# Altium PCB Arduino_DIY_V1.0.PcbDoc (part 1 of 3)
Units mil, origin at the board's own origin, x right, y up, seen from the top; angles counter-clockwise.
Board outline 4035.9 x 4932.05 mil, 2 copper layers (Top Layer, Bottom Layer), stack 46.063 mil thick; 122 components, 93 nets, 431 pads, 264 vias.
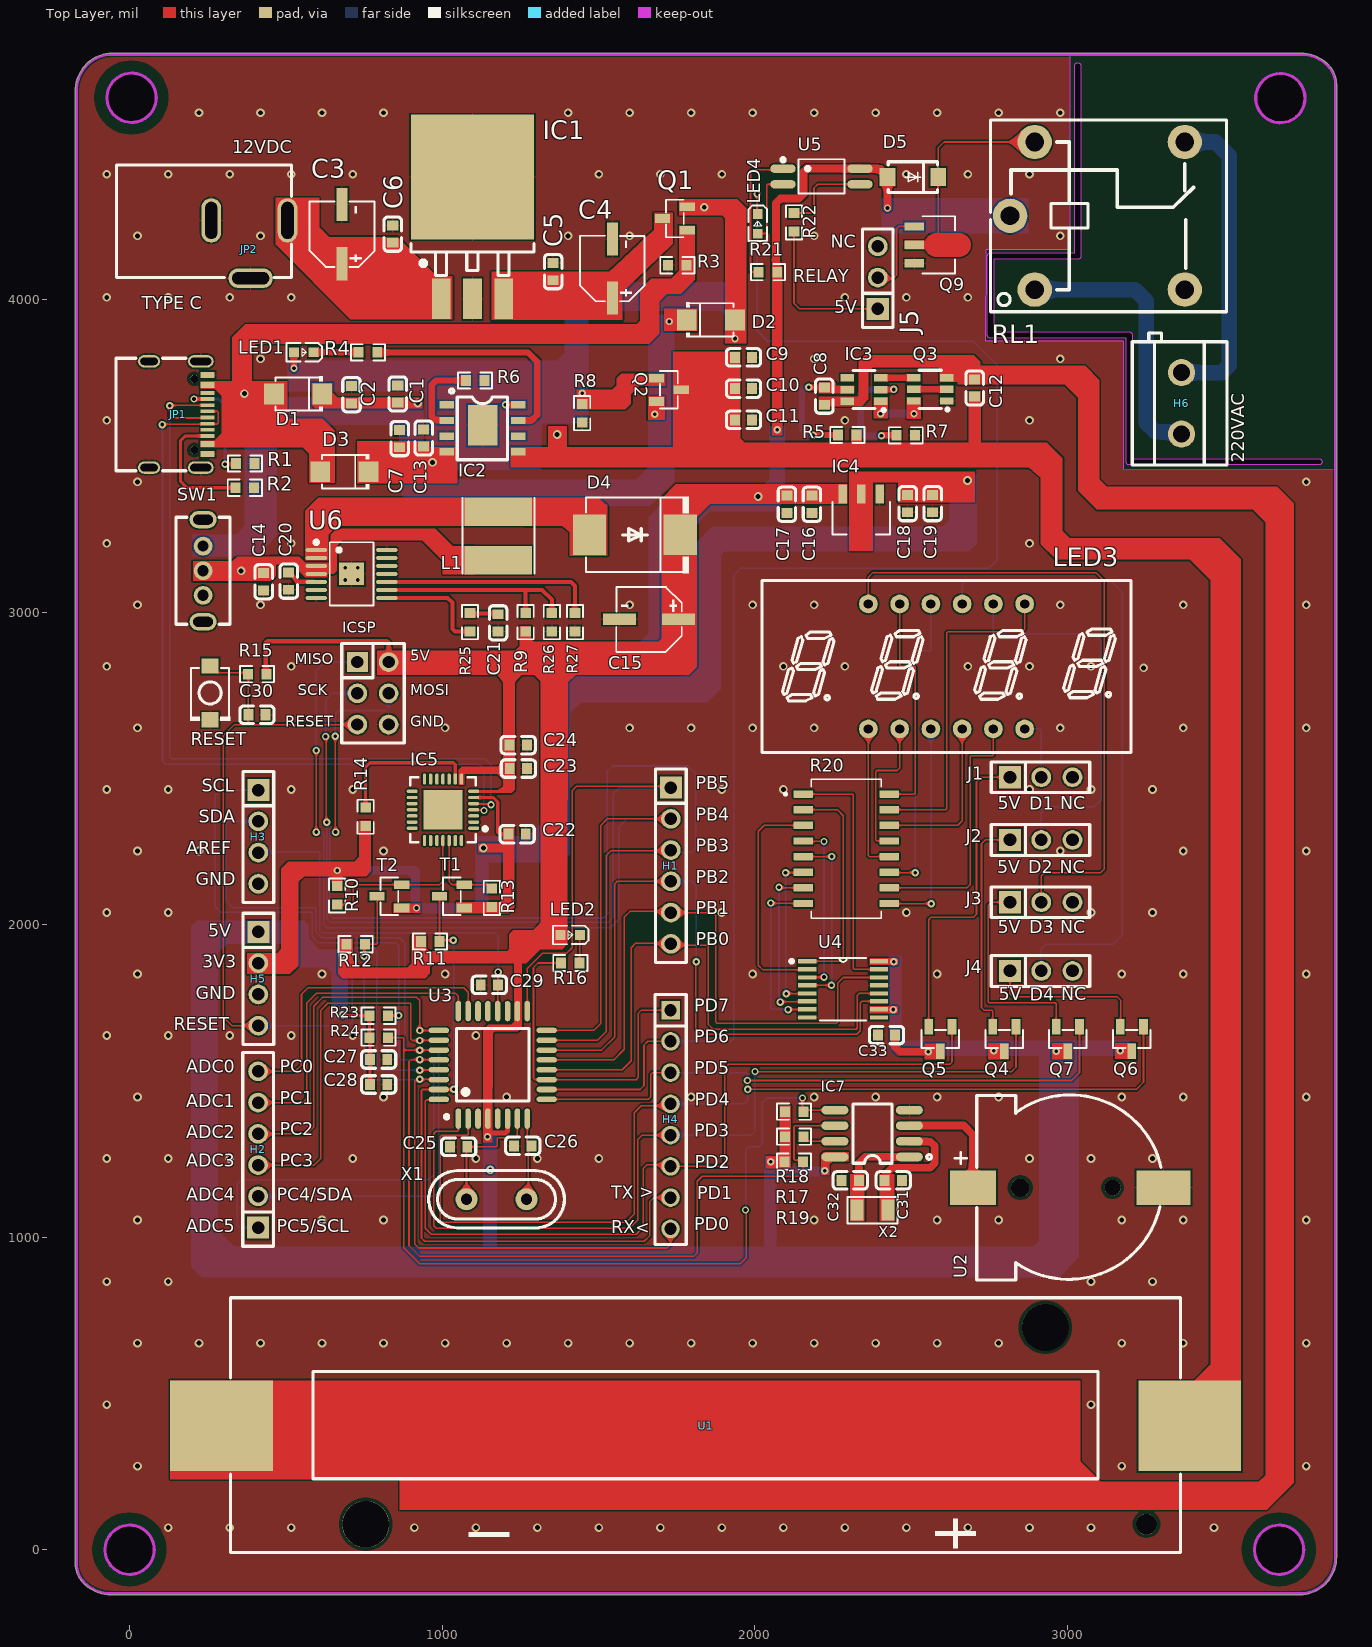
[diagram p0: Top Layer view]
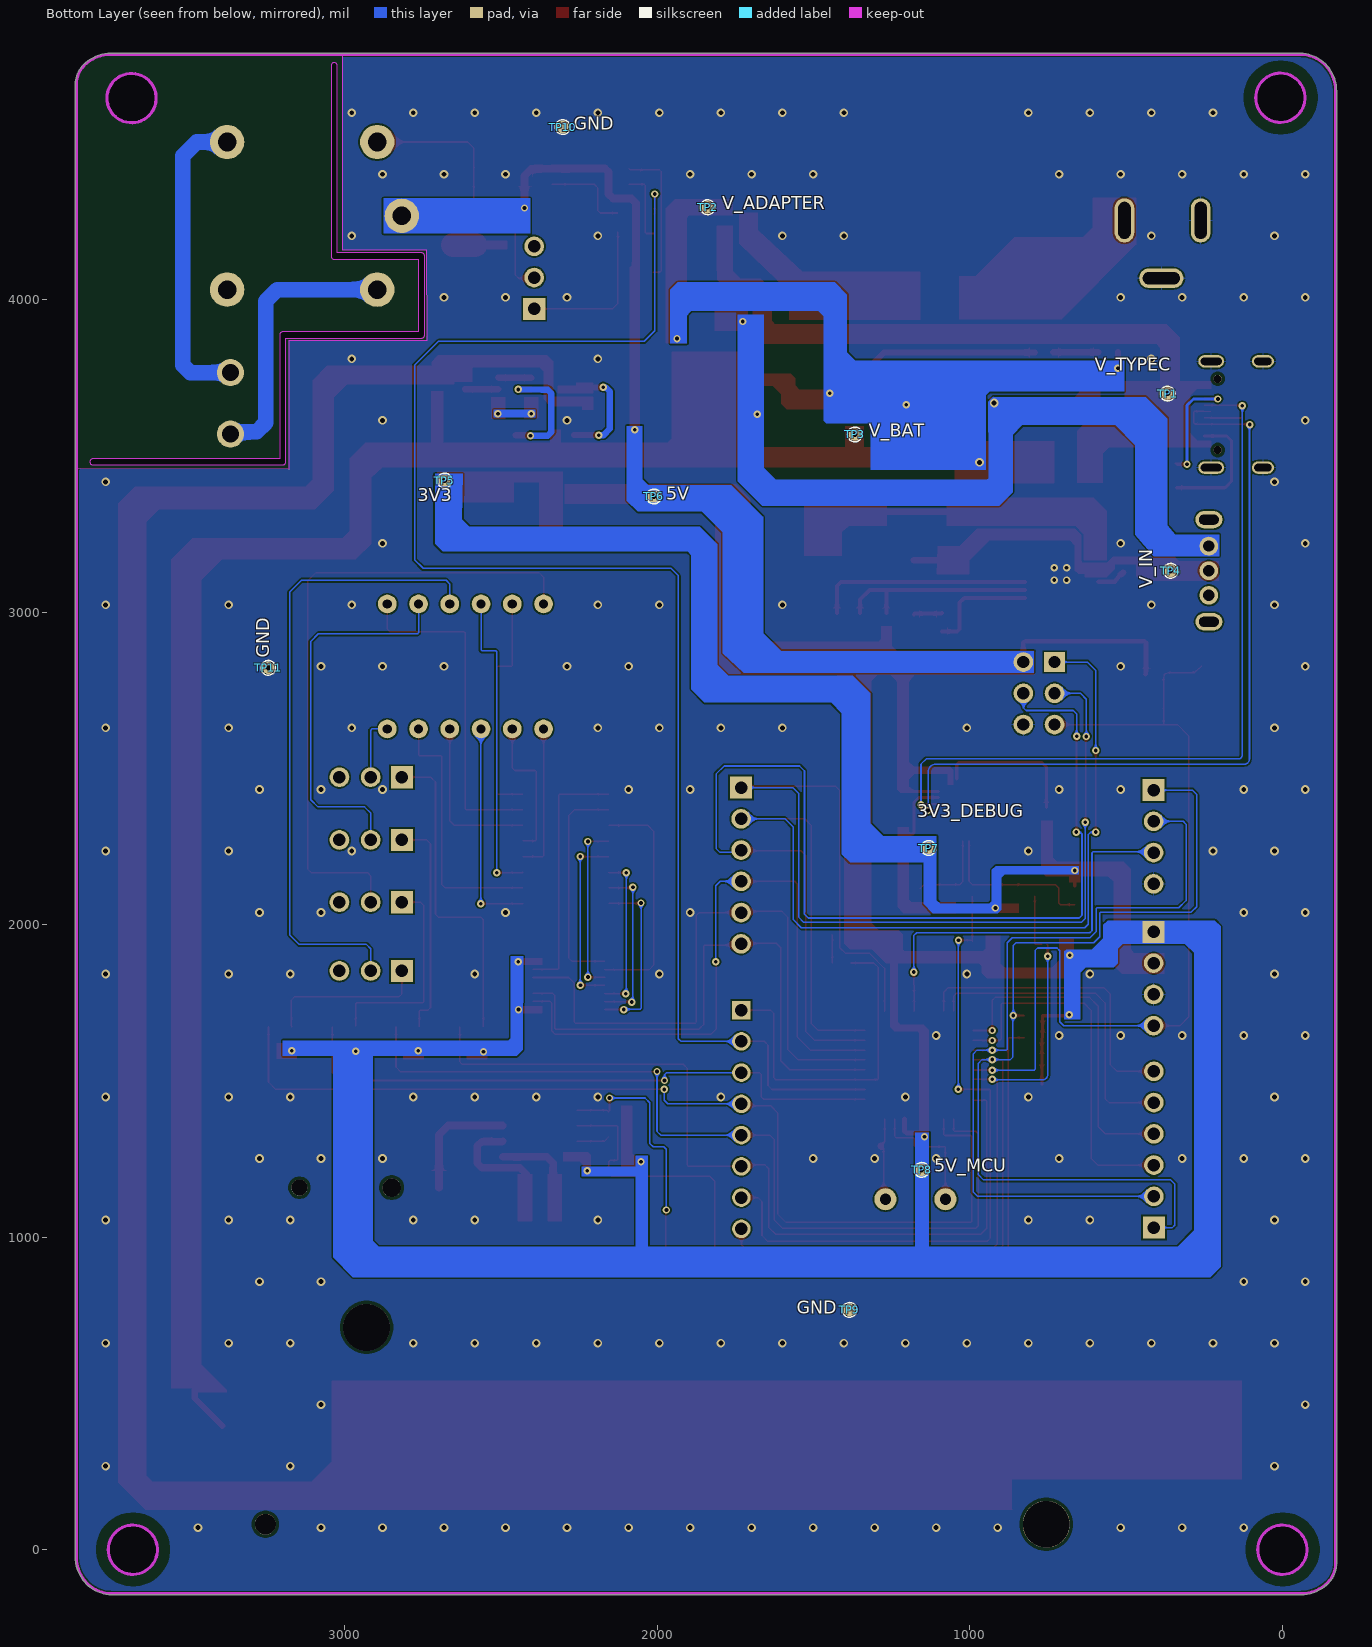
[diagram p1: Bottom Layer view, seen from below]

## Layer stack, top to bottom
Top Solder: solder mask 0.5, Solder Resist, Dk 3.8
Top Layer: signal copper 1.378
Dielectric 1: dielectric 43.307, FR-4, Dk 4.5
Bottom Layer: signal copper 1.378
Bottom Solder: solder mask 0.5, Solder Resist, Dk 3.8

## Board outline
-147.74,-107.19 cw(c-85.45,-44.9) -173.55,-44.9 -173.55,4667.4 cw(c-48.88,4667.4) -137.03,4755.54 cw(c-57.84,4676.35) -57.84,4788.35 3748.41,4788.35 cw(c3748.41,4663.68) 3836.56,4751.83 cw(c3774.26,4689.54) 3862.36,4689.54 3862.36,-22.75 cw(c3737.7,-22.75) 3825.85,-110.9 cw(c3746.65,-31.71) 3746.65,-143.71 -59.59,-143.71 cw(c-59.59,-19.04)
cut-out: 2754.66,3877.14 cw(c2754.66,3887) 2744.8,3887 2744.8,4140 cw(c2754.66,4140) 2754.66,4149.86 3024.14,4149.86 3024.14,4749 cw(c3034,4749) 3043.86,4749 3043.86,4139 cw(c3034,4139) 3029.67,4130.14 2764.52,4130.14 2764.52,3896.86 3199,3896.86 cw(c3199,3887) 3208.86,3887 3208.86,3490.86 3806,3490.86 cw(c3806,3481) 3815.86,3481 cw(c3806,3481) 3806,3471.14 3199,3471.14 cw(c3199,3481) 3189.14,3481 3189.14,3877.14
cut-out: 3682.43,4566.38 cw(c3682.43,4645.12) 3603.69,4645.12 cw(c3682.43,4645.12) 3682.43,4723.86 cw(c3682.43,4645.12) 3761.17,4645.12 cw(c3682.43,4645.12)
cut-out: 6.39,4567.51 cw(c6.39,4646.25) -72.35,4646.25 cw(c6.39,4646.25) 6.39,4724.99 cw(c6.39,4646.25) 85.13,4646.25 cw(c6.39,4646.25)
cut-out: 0,-78.74 cw(c0,0) -78.74,0 cw(c0,0) 0,78.74 cw(c0,0) 78.74,0 cw(c0,0)
cut-out: 3678.55,-78.74 cw(c3678.55,0) 3599.81,0 cw(c3678.55,0) 3678.55,78.74 cw(c3678.55,0) 3757.29,0 cw(c3678.55,0)

## Design rules (kind name [scope] priority, off if disabled: settings)
BoardOutlineClearance [All] p1: gap=7.87 ignorepadtopadclearanceinfootprint=FALSE
Clearance [All] p1: gap=5 ignorepadtopadclearanceinfootprint=FALSE except(9.84: Arc-Hole Track-Hole SMDPad-Hole THPad-Hole Via-Hole Fill-Hole Poly-Hole Region-Hole Text-Hole)
ComponentClearance [All] p1: gap=5 collisioncheckmode=3 verticalgap=5 showdistances=TRUE
DiffPairsRouting [All] p1: maxlimit=10 minlimit=5 mostfreqgap=5 toplayer_minwidth=5 toplayer_maxwidth=1000 toplayer_prefwidth=5 bottomlayer_minwidth=5 bottomlayer_maxwidth=1000 bottomlayer_prefwidth=5 maxuncoupledlength=500
Height [All] p1: minheight=0 maxheight=71497.94 prefheight=500
HoleSize [All] p1: absolutevalues=TRUE maxlimit=248.03 minlimit=11.81 maxpercent=80.000 minpercent=20.000
HoleToHoleClearance [All] p1: gap=9.84 allowstackedmicrovias=FALSE
MinimumAnnularRing [All] p1: minimumring=3
MinimumSolderMaskSliver [All] p1: minsoldermaskwidth=0
PlaneClearance [All] p1: clearance=5
PlaneConnect PlaneConnectPowerPads [InPadClass('PowerPads')] p1: planeconnectstyle=Direct reliefexpansion=20 reliefentries=4 reliefconductorwidth=10 reliefairgap=10
PlaneConnect [All] p2: pad.planeconnectstyle=Relief pad.reliefexpansion=11.81 pad.reliefentries=4 pad.reliefconductorwidth=5 pad.reliefairgap=5 via.planeconnectstyle=Direct via.reliefexpansion=11.81 via.reliefentries=4 via.reliefconductorwidth=5 via.reliefairgap=5
PolygonConnect PolygonConnectPowerPads [All vs (InPadClass('PowerPads'))] p1: connectstyle=Direct reliefconductorwidth=10 reliefentries=4 polygonreliefangle="90 Angle" airgapwidth=10
PolygonConnect [All] p2: thpad.connectstyle=Relief thpad.reliefconductorwidth=5 thpad.reliefentries=4 thpad.polygonreliefangle="90 Angle" thpad.airgapwidth=5 smdpad.connectstyle=Relief smdpad.reliefconductorwidth=5 smdpad.reliefentries=4 smdpad.polygonreliefangle="90 Angle" smdpad.airgapwidth=5 via.connectstyle=Direct via.reliefconductorwidth=5 via.reliefentries=4 via.polygonreliefangle="90 Angle" via.airgapwidth=5
RoutingVias [All] p1: holewidth=11.81 width=23.62 viastyle="Through Hole" minholewidth=11.81 minwidth=23.62 maxholewidth=23.62 maxwidth=259.84
SilkToSilkClearance [All] p1: silktosilkclearance=0
SilkToSolderMaskClearance [IsPad] p1: minsilkscreentomaskgap=5 clearancetoexposedcopper=TRUE
SolderMaskExpansion [All] p1: expansion=2.95 istentingtop=FALSE
Width [All] p1: maxlimit=1000 minlimit=5 preferedwidth=5 minimp=50.000000 maximp=50.000000 favimp=50.000000
20 further rules are at their usual default settings.

## Classes and differential pairs
component class "4 DIGIT 7 SEGMENT": C33 J1 J2 J3 J4 LED3 Q4 Q5 Q6 Q7 R20 U4
component class "VOLTAGE SOURCE": C1 C2 C3 C4 C5 C6 C7 C8 C9 C10 C11 C12 C13 C14 C15 C16 C17 C18 C19 C20 C21 D1 D2 D3 D4 IC1 IC2 IC3 IC4 JP1 JP2 L1 LED1 Q1 Q2 Q3 R1 R2 R3 R4 R5 R6 R7 R8 R9 R25 R26 R27 SW1 TP1 TP2 TP3 TP4 TP5 TP6 TP9 TP10 TP11 U1 U6 V_IN
component class PERIPHERALS: C31 C32 D5 H1 H2 H3 H4 H5 H6 IC7 ICSP J5 LED4 Q9 R17 R18 R19 R21 R22 R23 R24 RL1 U2 U5 X2
component class MCU: C22 C23 C24 C25 C26 C27 C28 C29 C30 IC5 LED2 R10 R11 R12 R13 R14 R15 R16 RESET T1 T2 TP7 TP8 U3 X1

## Components (designator, comment, footprint, x,y, rotation, side; value= is the part's Value field where it differs from the comment)
C1 "100nF" C0603 858.15,3698.49 r270 top
C2 "22uF" C0603 710.14,3696.01 r270 top
C3 "47uF, 25V" CAP_ALU_C 680.15,4209.84 r90 top
C4 "47uF, 25V" CAP_ALU_C 1545.15,4099.85 r90 top
C5 "100nF" C0603 1355.15,4089.85 r270 top
C6 "330nF" C0603 842.15,4209.84 r270 top
C7 "100nF" C0603 864.15,3555.49 r270 top
C8 "100nF" C0603 2223.15,3691.49 r90 top
C9 "100nF" C0603 1964.37,3815.45 r180 top
C10 "10uF" C0603 1964.37,3715.45 r180 top
C11 "22uF" C0603 1964.37,3615.45 r180 top
C12 "10uF" C0603 2704.15,3717.49 r270 top
C13 "10uF" C0603 941.15,3557.49 r270 top
C14 "22uF" C0603 429.15,3097.49 r90 top
C15 "47uF, 25V" CAP_ALU_C 1662.15,2977.49 r180 top
C16 "10uF" C0603 2183.5,3345.49 r90 top
C17 "22uF" C0603 2103.5,3345.49 r90 top
C18 "10uF" C0603 2489.8,3347.49 r90 top
C19 "22uF" C0603 2569.8,3347.49 r90 top
C20 "47nF" C0603 509.15,3099.49 r90 top
C21 "33nF" C0603 1179.15,2966 r90 top
C22 "100nF" C0603 1240.15,2289.85 r180 top
C23 "100nF" C0603 1244.15,2499.84 r180 top
C24 "1uF" C0603 1243.59,2574.84 r180 top
C25 "33pF" C0603 1053.15,1289.49 r180 top
C26 "33pF" C0603 1258.15,1292.49 r180 top
C27 "10uF" C0603 797.15,1568.85 r180 top
C28 "10nF" C0603 797.15,1488.85 r180 top
C29 "100nF" C0603 1151.15,1807.49 r0 top
C30 "10pF" C0603 407.65,2671.85 r0 top
C31 "33pF" C0603 2443.7,1181.84 r0 top
C32 "33pF" C0603 2306.15,1181.84 r180 top
C33 "10uF" C0603 2422.1,1646.92 r180 top
D1 "S3MF" D_SMAF_L3.5-W2.6-LS4.7-RD 539.15,3698.49 r180 top
D2 "S3MF" D_SMAF_L3.5-W2.6-LS4.7-RD 1860.15,3935.49 r0 top
D3 "S3MF" D_SMAF_L3.5-W2.6-LS4.7-RD 687.15,3449.49 r180 top
D4 "SS54" SMC 1617.15,3247.49 r180 top
D5 "1N4007_M7" SMA(DO-214AC) 2506.15,4392.49 r0 top
H1 "6P 2.54mm Female Header" "6P, 2,54mm, FEMALE HEADER" 1731.94,2188.85 r270 top
H2 "6P 2.54mm Female Header" "6P, 2,54mm, FEMALE HEADER" 411.15,1280.85 r90 top
H3 "4P 2.54mm Female Header" "4P, 2,54mm, FEMALE HEADER" 411.93,2280.85 r270 top
H4 "8P 2.54mm Female Header" "8P, 2,54mm, FEMALE HEADER" 1731.15,1376.73 r270 top
H5 "4P 2.54mm Female Header" "4P, 2,54mm, FEMALE HEADER" 411.93,1827.01 r270 top
H6 "KF301-5.0-2P" CONN-TH_P5.00_KF301-5.0-2P 3366.15,3668.49 r90 top
IC1 "LM7805" TO-263-3L 1099.15,4393.76 r90 top
IC2 "TP4056" ESOP-8 1130.15,3586.49 r270 top
IC3 "DW01A" SOT-23-6 2350.15,3712.49 r90 top
IC4 "AMS1117-3.3" SOT-89-3L 2341.15,3378.49 r90 top
IC5 "CP2102" WQFN-28-EP(5x5) 1002.72,2367.8 r180 top
IC7 "DS1307" SOIC-8 2376.15,1331.84 r180 top
ICSP "2x3P 2.54mm Female Header" "2x3P, 2.54mm, Female Header" 778.87,2740.49 r0 top
J1 "JUMPER_SHUNT_3P" JUMPER_SHUNT_3P 2817.31,2472.06 r0 top
J2 "JUMPER_SHUNT_3P" JUMPER_SHUNT_3P 2817.31,2271.27 r0 top
J3 "JUMPER_SHUNT_3P" JUMPER_SHUNT_3P 2817.31,2072.06 r0 top
J4 "JUMPER_SHUNT_3P" JUMPER_SHUNT_3P 2817.31,1852.06 r0 top
J5 "JUMPER_SHUNT_3P" JUMPER_SHUNT_3P 2394.15,3970.84 r90 top
JP1 "TYPE_C_16P, Female" TYPE_C_16P 156.15,3632.85 r270 top
JP2 "DC_POWER_JACK" DC_POWER_JACK_6.3mm_2.1mm 261.3,4253.85 r0 top
L1 "4.7uH 3.1A" CD54 1180.15,3241.49 r270 top
LED1 "Red" LED0603_RED 557.15,3831.84 r0 top
LED2 "Blue" LED0603_BLUE 1409.84,1967.54 r0 top
LED3 "LED7SEG" LED7SEG_4 2614.15,2826.49 r0 top
LED4 "Green" LED0603_GREEN 2010.15,4242.85 r90 top
Q1 "AO3401" TF_SOT_23_3 1704.9,4259.84 r90 top
Q2 "AO3401" TF_SOT_23_3 1765.13,3711.9 r270 top
Q3 "FS8205A" TF_SOT23-6 2615.46,3676.1 r180 top
Q4 "ZXTN2031FTA" SOT-23 2799,1634.43 r90 top
Q5 "ZXTN2031FTA" SOT-23 2594.31,1634.43 r90 top
Q6 "ZXTN2031FTA" SOT-23 3207,1634.43 r90 top
Q7 "ZXTN2031FTA" SOT-23 3002.31,1634.43 r90 top
Q9 "2N2222" SOT-89-3L 2511.15,4175.55 r180 top
R1 "5.1kΩ" R0603 424.02,3501.85 r180 top
R2 "5.1kΩ" R0603 423.33,3424.5 r180 top
R3 "10kΩ" R0603 1698.27,4084.49 r0 top
R4 "10kΩ" R0603 708.27,3805.49 r0 top
R5 "100Ω" R0603 2242.12,3540.99 r0 top
R6 "2kΩ" R0603 1160.02,3767.5 r180 top
R7 "1kΩ" R0603 2538.19,3592.01 r180 top
R8 "10kΩ" R0603 1474.16,3582.31 r90 top
R9 "49.9kΩ" R0603 1241.15,3022.72 r270 top
R10 "10kΩ" R0603 690.16,2039.31 r90 top
R11 "10kΩ" R0603 1016.02,1972.5 r180 top
R12 "10kΩ" R0603 778.02,1963.5 r180 top
R13 "10kΩ" R0603 1133.14,2140.72 r270 top
R14 "1kΩ" R0603 729.14,2400.03 r270 top
R15 "10kΩ" R0603 353.46,2775.84 r0 top
R16 "330Ω" R0603 1355.65,1851.53 r0 top
R17 "4.7kΩ" R0603 2181.02,1347.85 r180 top
R18 "4.7kΩ" R0603 2181.02,1427.85 r180 top
R19 "4.7kΩ" R0603 2180.33,1267.85 r180 top
R20 "RES_ARRAY_8_RES_330Ω" SOIC-16-5.6mm 2293.31,2243.06 r0 top
R21 "330Ω" R0603 1988.27,4062.49 r0 top
R22 "2kΩ" R0603 2100.14,4302.37 r270 top
R23 "4.7kΩ" R0603 851.33,1734.85 r180 top
R24 "4.7kΩ" R0603 851.33,1664.85 r180 top
R25 "2.55kΩ" R0603 1063.14,3022.72 r270 top
R26 "16.2kΩ" R0603 1377.16,2913.65 r90 top
R27 "133KΩ" R0603 1451.16,2913.65 r90 top
RESET "SMD 3mm×4mm" "ROUND_BUTTON_SMD 3*4mm" 257.65,2741.85 r270 top
RL1 "SRD-05VDC-SL-C" "Through Hole,15.6x19.2mm" 3097.15,4268.49 r0 top
SW1 "SK12D07VG4" SK12D07VG4 235.15,3296.23 r270 top
T1 "BS170F" SOT-23 1031.15,2090.84 r0 top
T2 "BS170F" SOT-23 831.15,2090.84 r0 top
TP1 "Test Point" TEST_POINT 367.15,3699.49 r90 bottom
TP2 "Test Point" TEST_POINT 1838.97,4296.03 r90 bottom
TP3 "Test Point" TEST_POINT 1368.15,3568.84 r90 bottom
TP4 "Test Point" TEST_POINT 357.15,3132.49 r90 bottom
TP5 "Test Point" TEST_POINT 2681.15,3421.49 r180 bottom
TP6 "Test Point" TEST_POINT 2011.15,3370.49 r90 bottom
TP7 "Test Point" TEST_POINT 1132.15,2245.49 r0 bottom
TP8 "Test Point" TEST_POINT 1154.15,1215.49 r270 bottom
TP9 "Test Point" TEST_POINT 1385.15,767.49 r90 bottom
TP10 "Test Point" TEST_POINT 2302.73,4552.45 r90 bottom
TP11 "Test Point" TEST_POINT 3245,2822 r180 bottom
U1 "Battery Holder 18650 SMD" PIN_18650_1S_HOLDER_SMD 1843.15,396.49 r180 top
U2 "3V_COIN_BATTERY_HOLDER" 3V_COIN_BATERRY_HOLDER_CR1220 3003.69,1158.49 r180 top
U3 "ATMEGA328P-AU" "TQFP-32 (7x7)" 1162.15,1551.49 r90 top
U4 "74HC595" TSSOP16 2283.31,1793.06 r0 top
U5 "TLP291" SO-4 2214.15,4394.49 r0 top
U6 "TPS61175PWPR" HTSSOP-14-EP 710.15,3122.49 r270 top
X1 "16MHz" HC-49S 1174.15,1121.49 r180 top
X2 "32.768kHz" SMD3215-2P 2377.15,1086.49 r0 top

## Footprints (in the part's own frame and the unit in brackets; to place one, negate y for a bottom-side part, rotate by r counter-clockwise, add the part's x,y. Pads: shape width x height; smd on the part's side, far side on the other; paste and mask are expansions set on the pad)
"2x3P, 2.54mm, Female Header" [mm]
  rect 1.7x1.6 hole 1 paste-2539.97 mask+0.051: 1(-1.27,2.54)
  round 1.6 hole 1 paste-2539.97 mask+0.051: 2(-1.27,0) 3(-1.27,-2.54) 4(1.27,-2.54) 5(1.27,0) 6(1.27,2.54)
  silkscreen extent -2.54,-4.04 2.54,4.04, body extent -2.5,-4.06 2.5,4.06, height 8.5
3V_COIN_BATERRY_HOLDER_CR1220 [mm]
  rect 3.75x2.8 smd paste+0 mask+0.051: 1(7.75,0)
  rect 4.4x2.8 smd paste+0 mask+0.051: 2(-7.75,0)
  round 1.3 hole 1.3 unplated paste-2539.97: ""(-3.6,0)
  round 1.5 hole 1.5 unplated paste-2539.97: ""(3.9,0)
  silkscreen extent -7.55,-7.54 9.22,7.49, body extent -9.78,-7.4 9.42,7.35, height 4.25
"4P, 2,54mm, FEMALE HEADER" [mm]
  rect 1.8x1.8 hole 1.02 paste-2539.97 mask+0.051: 1(-3.81,0)
  round 1.6 hole 1.02 paste-2539.97 mask+0.051: 2(-1.27,0) 3(1.27,0) 4(3.81,0)
  silkscreen extent -5.33,-1.25 5.33,1.25, body extent -5.08,-1.25 5.08,1.25, height 8.5
"6P, 2,54mm, FEMALE HEADER" [mm]
  rect 1.8x1.8 hole 1.02 paste-2539.97 mask+0.051: 1(-6.35,0)
  round 1.6 hole 1.02 paste-2539.97 mask+0.051: 2(-3.81,0) 3(-1.27,0) 4(1.27,0) 5(3.81,0) 6(6.35,0)
  silkscreen extent -7.87,-1.25 7.87,1.25, body extent -7.62,-1.25 7.62,1.25, height 8.5
"8P, 2,54mm, FEMALE HEADER" [mm]
  rect 1.5x1.5 hole 1 paste-2539.97 mask+0.051: 1(-8.89,0)
  round 1.5 hole 1 paste-2539.97 mask+0.051: 2(-6.35,0) 3(-3.81,0) 4(-1.27,0) 5(1.27,0) 6(3.81,0) 7(6.35,0) 8(8.89,0)
  silkscreen extent -10.16,-1.27 10.16,1.27, body extent -10.16,-1.25 10.16,1.25, height 8.5
C0603 [mm]
  rect 0.8x0.9 smd paste+0 mask+0.051: 1(-0.7,0) 2(0.7,0)
  silkscreen extent -1.39,-0.71 1.39,0.71, body extent -0.8,-0.39 0.8,0.41, height 0.8
CAP_ALU_C [mm]
  rect 2.7x0.91 smd paste+0 mask+0.051: 1(-2.4,0) 2(2.4,0)
  silkscreen extent -2.66,-2.62 2.66,2.65, body extent -3.25,-2.76 3.25,2.76, height 6.15
CD54 [mil]
  rect 90x216.53 smd paste-3937.01 mask+1.97: 1(75,0) 2(-80,0)
  silkscreen extent -124,-115 118,115, body extent -114,-102 114,102, height 177
CONN-TH_P5.00_KF301-5.0-2P [mm]
  round 2.2 hole 1.4 paste-2539.97 mask+0.051: 1(-2.5,0) 2(2.5,0)
  silkscreen extent -5,-3.7 5.71,4, body extent -5,-3.55 5,4.05, height 10
D_SMAF_L3.5-W2.6-LS4.7-RD [mm]
  rect 1.6x1.7 smd paste+0 mask+0.051: 1(-1.96,0.001) 2(1.96,0.001)
  silkscreen extent -2.01,-1.43 1.83,1.42, body extent -2.65,-1.27 2.65,1.27, height 1
DC_POWER_JACK_6.3mm_2.1mm [mm]
  oval 1.6x3.6 hole 1 slot 3 at 90 deg paste-2539.97 mask+0.051: 1(6.2,0) 2(0,0)
  oval 3.6x1.6 hole 1 slot 3 at 0 deg paste-2539.97 mask+0.051: 3(3.2,-4.7)
  silkscreen extent -7.7,-4.64 6.52,4.51, body extent -7.72,-4.95 6.48,4.45, height 11.09
ESOP-8 [mm]
  rect 0.6x1.2 smd paste+0 mask+0.051: 1(-1.956,-2.934) 2(-0.686,-2.934) 3(0.584,-2.934) 4(1.854,-2.934) 5(1.854,2.883) 6(0.584,2.883) 7(-0.686,2.883) 8(-1.956,2.883)
  rect 3.3x2.4 smd paste+0 mask+0.051: 9(-0.305,0)
  silkscreen extent -3.25,-2.7 2.5,2.02, body extent -2.55,-3.1 2.45,3.1, height 1.82
HC-49S [mm]
  round 1.8 hole 0.9 paste+0 mask+0.051: 1(-2.44,0) 2(2.44,0)
  silkscreen extent -5.52,-2.32 5.52,2.33, body extent -5.83,-2.67 5.83,2.67, height 3.99
HTSSOP-14-EP [mm]
  oval 0.343x1.731 smd paste+0 mask+0.051: 1(-1.95,-2.866) 2(-1.3,-2.866) 3(-0.65,-2.866) 4(0,-2.866) 5(0.65,-2.866) 6(1.3,-2.866) 7(1.95,-2.866) 8(1.95,2.866) 9(1.3,2.866) 10(0.65,2.866) 11(0,2.866) 12(-0.65,2.866) 13(-1.3,2.866) 14(-1.95,2.866)
  rect 1.83x2.055 smd paste+0 mask+0.051: 15(0,0)
  silkscreen extent -2.72,-3.02 2.58,1.77, body extent -2.5,-3.2 2.5,3.2, height 1.2
JUMPER_SHUNT_3P [mm]
  rect 1.8x1.8 hole 1.02 paste-2539.97 mask+0.051: 1(0,0)
  round 1.6 hole 1.02 paste-2539.97 mask+0.051: 2(2.54,0) 3(5.08,0)
  silkscreen extent -1.52,-1.25 6.48,1.25, body extent -1.27,-1.27 6.41,1.27, height 8.6
LED7SEG_4 [mil]
  round 60 hole 30: 1(-250,-200) 2(-150,-200) 3(-50,-200) 4(50,-200) 5(150,-200) 6(250,-200) 7(250,200) 8(150,200) 9(50,200) 10(-50,200) 11(-150,200) 12(-250,200)
  silkscreen extent -591,-276 591,276, body extent -591,-276 591,276, height 423
LED0603_BLUE [mm]
  rect 0.8x0.8 smd paste+0 mask+0.051: 1(-0.799,0) 2(0.799,0)
  silkscreen extent -1.39,-0.76 1.49,0.75, body extent -0.8,-0.4 0.8,0.4, height 0.6
LED0603_GREEN [mm]
  rect 0.8x0.8 smd paste+0 mask+0.051: 1(-0.799,0) 2(0.799,0)
  silkscreen extent -1.39,-0.76 1.49,0.75, body extent -0.8,-0.4 0.8,0.4, height 0.6
LED0603_RED [mm]
  rect 0.8x0.8 smd paste+0 mask+0.051: 1(-0.799,0) 2(0.799,0)
  silkscreen extent -1.39,-0.76 1.49,0.75, body extent -0.8,-0.4 0.8,0.4, height 0.6
PIN_18650_1S_HOLDER_SMD [mm]
  rect 8.34x7.35 smd paste+0 mask+0.051: 1(-39.345,0) 2(39.345,0)
  round 1.7 hole 1.7 unplated paste-2539.97: ""(-35.84,8)
  round 3.8 hole 3.8 unplated paste-2539.97: ""(-27.62,-8) ""(27.62,8)
  silkscreen extent -38.61,-10.41 38.61,10.29, body extent -43.22,-10.4 43.22,10.4, height 17.46
R0603 [mil]
  rect 31.75x34.02 smd paste+0 mask+2: 1(24.88,26.01) 2(84.19,26.01)
  silkscreen extent 0,0 109,52, body extent 24,10 86,42, height 18
"ROUND_BUTTON_SMD 3*4mm" [mm]
  rect 1.23x1.36 smd paste+0 mask+0.051: 1(-2.185,0) 2(2.185,0)
  silkscreen extent -2.03,-1.62 2.25,1.62, body extent -2.45,-1.48 2.55,1.47, height 1.96
SK12D07VG4 [mil]
  round 60 hole 36 paste-99999 mask+1.97: 1(84.65,0) 2(163.39,0) 3(242.13,0)
  oval 55.12x86.61 hole 31.5 slot 62.99 at 90 deg paste-99999 mask+1.97: 4(0,0) 4(326.77,0)
  silkscreen extent -8,-87 335,87, body extent -16,-200 345,87, height 138
SMA(DO-214AC) [mil]
  rect 50x57.9 smd paste+0 mask+2: 1(-81,0) 2(81,0)
  silkscreen extent -78,-49 79,49, body extent -102,-57 102,57, height 91
SMC [mm]
  rect 2.7x3.3 smd paste+0 mask+0.051: 1(-3.686,0) 2(3.686,0)
  silkscreen extent -4.36,-3.1 3.98,3.1, body extent -3.97,-2.95 3.97,2.95, height 2.5
SMD3215-2P [mm]
  rect 1.05x1.7 smd paste+0 mask+0.051: 1(-1.27,0) 2(1.27,0)
  silkscreen extent -2.03,-1.08 2.03,1.08, body extent -1.65,-0.8 1.65,0.8, height 0.89
SO-4 [mm]
  oval 2.056x0.7 smd paste+0 mask+0.051: 1(-3.128,0.635) 2(-3.128,-0.635) 3(3.128,-0.635) 4(3.128,0.635)
  silkscreen extent -3.28,-1.4 1.87,1.5, body extent -3.5,-1.42 3.5,1.42, height 2.21
SOIC-8 [mm]
  oval 2.2x0.7 smd paste+0 mask+0.051: 1(-3.023,1.905) 2(-3.023,0.635) 3(-3.023,-0.635) 4(-3.023,-1.905) 5(3.023,-1.905) 6(3.023,-0.635) 7(3.023,0.635) 8(3.023,1.905)
  silkscreen extent -4.82,-2.41 1.55,2.41, body extent -2.95,-2.45 2.95,2.45, height 1.52
SOIC-16-5.6mm [mm]
  rrect15% 1.59x0.6 smd: 1(-3.495,4.445) 2(-3.495,3.175) 3(-3.495,1.905) 4(-3.495,0.635) 5(-3.495,-0.635) 6(-3.495,-1.905) 7(-3.495,-3.175) 8(-3.495,-4.445) 9(3.495,-4.445) 10(3.495,-3.175) 11(3.495,-1.905) 12(3.495,-0.635) 13(3.495,0.635) 14(3.495,1.905) 15(3.495,3.175) 16(3.495,4.445)
  silkscreen extent -5.04,-5.65 2.86,5.65, body extent -3.81,-5.59 3.81,5.59, height 2.4
SOT-23 [mm]
  rect 1.25x0.7 smd: 1(1,-0.95) 2(1,0.95) 3(-1,0)
  silkscreen extent -0.73,-1.53 0.73,1.53, body extent -1.25,-1.5 1.25,1.5, height 1.1
SOT-23-6 [mm]
  rect 0.6x1.1 smd paste+0 mask+0.051: 1(-0.95,-1.35) 2(0,-1.35) 3(0.95,-1.35) 4(0.95,1.35) 5(0,1.35) 6(-0.95,1.35)
  silkscreen extent -1.79,-1.72 1.55,0.9, body extent -1.46,-1.6 1.46,1.6, height 1.14
SOT-89-3L [mm]
  rect 1.575x0.672 smd paste+0 mask+0.051: 1(0,-1.5) 2(0,0) 3(0,1.5)
  Top Layer region: -3.64,0.959 -1.785,0.959 -1.741,0.958 -1.696,0.955 -1.652,0.949 -1.608,0.942 -1.565,0.933 -1.522,0.921 -1.479,0.908 -1.437,0.893 -1.396,0.875 -1.356,0.856 -1.317,0.835 -1.279,0.812 -1.241,0.788 -1.206,0.761 -1.171,0.733 -1.138,0.704 -1.106,0.673 -1.075,0.64 -1.047,0.606 -1.019,0.571 -0.994,0.534 -0.97,0.496 -0.948,0.458 -0.928,0.418 -0.91,0.339 0.788,0.339 0.775,-0.33 -0.901,-0.336 -0.928,-0.401 -0.948,-0.44 -0.97,-0.479 -0.994,-0.517 -1.019,-0.553 -1.047,-0.589 -1.075,-0.623 -1.106,-0.655 -1.138,-0.686 -1.171,-0.716 -1.206,-0.744 -1.241,-0.77 -1.279,-0.795 -1.317,-0.818 -1.356,-0.839 -1.396,-0.858 -1.437,-0.875 -1.479,-0.891 -1.522,-0.904 -1.565,-0.915 -1.608,-0.925 -1.652,-0.932 -1.696,-0.937 -1.741,-0.94 -1.785,-0.941 -3.64,-0.941 -3.684,-0.94 -3.728,-0.937 -3.773,-0.932 -3.817,-0.925 -3.86,-0.915 -3.903,-0.904 -3.946,-0.891 -3.988,-0.875 -4.029,-0.858 -4.069,-0.839 -4.108,-0.818 -4.146,-0.795 -4.183,-0.77 -4.219,-0.744 -4.254,-0.716 -4.287,-0.686 -4.319,-0.655 -4.349,-0.623 -4.378,-0.589 -4.405,-0.553 -4.431,-0.517 -4.455,-0.479 -4.477,-0.44 -4.497,-0.401 -4.515,-0.36 -4.531,-0.319 -4.546,-0.276 -4.558,-0.234 -4.568,-0.19 -4.577,-0.147 -4.583,-0.102 -4.587,-0.058 -4.589,-0.014 -4.589,0.031 -4.587,0.075 -4.583,0.12 -4.577,0.164 -4.568,0.208 -4.558,0.251 -4.546,0.294 -4.531,0.336 -4.515,0.377 -4.497,0.418 -4.477,0.458 -4.455,0.496 -4.431,0.534 -4.405,0.571 -4.378,0.606 -4.349,0.64 -4.319,0.673 -4.287,0.704 -4.254,0.733 -4.219,0.761 -4.183,0.788 -4.146,0.812 -4.108,0.835 -4.069,0.856 -4.029,0.875 -3.988,0.893 -3.946,0.908 -3.903,0.921 -3.86,0.933 -3.817,0.942 -3.773,0.949 -3.728,0.955 -3.684,0.958
  silkscreen extent -3.31,-2.33 -0.65,2.33, body extent -3.88,-2.25 0.37,2.25, height 1.54
TEST_POINT [mm]
  round 1 smd: 1(0,0)
  silkscreen extent -0.6,-0.6 0.6,0.6
TF_SOT23-6 [mm]
  rect 1.1x0.6 smd paste+0 mask+0.051: 1(0,0) 2(0,-0.95) 3(0,-1.9) 4(2.7,-1.9) 5(2.7,-0.95) 6(2.7,0)
  silkscreen extent -0.17,-2.5 2.25,0.83, body extent 0.12,-2.44 2.62,0.56, height 1.1
TF_SOT_23_3 [mm]
  rect 0.7x1.25 smd paste+0 mask+0.051: 1(-0.95,-2.006) 2(0.95,-2.006) 3(0,-0.006)
  silkscreen extent -1.53,-1.73 1.53,-0.28, body extent -1.52,-2.29 1.47,0.21, height 1.1
"Through Hole,15.6x19.2mm" [mil]
  round 110 hole 60 paste-99999 mask+2: 1(-200.79,-236.22) 2(279.53,-236.2) 3(279.53,236.2) 4(-200.79,236.22) 5(-279.53,0)
  silkscreen extent -342,-307 413,307, body extent -338,-302 418,312, height 622
TO-263-3L [mil]
  rect 129.92x59.49 smd paste+0 mask+2: 1(-390.91,102) 2(-390.91,2) 3(-390.91,-98)
  rect 398.5x394.49 smd paste+0 mask+2: 4(-1,2)
  silkscreen extent -316,-195 -214,199, body extent -440,-192 176,202, height 189
"TQFP-32 (7x7)" [mm]
  oval 1.65x0.45 smd paste+0 mask+0.051: 1(-4.369,2.8) 2(-4.369,2) 3(-4.369,1.2) 4(-4.369,0.4) 5(-4.369,-0.4) 6(-4.369,-1.2) 7(-4.369,-2) 8(-4.369,-2.8) 17(4.369,-2.8) 18(4.369,-2) 19(4.369,-1.2) 20(4.369,-0.4) 21(4.369,0.4) 22(4.369,1.2) 23(4.369,2) 24(4.369,2.8)
  oval 0.45x1.65 smd paste+0 mask+0.051: 9(-2.8,-4.381) 10(-2,-4.381) 11(-1.2,-4.381) 12(-0.4,-4.381) 13(0.4,-4.381) 14(1.2,-4.381) 15(2,-4.381) 16(2.8,-4.381) 25(2.8,4.382) 26(2,4.382) 27(1.2,4.382) 28(0.4,4.382) 29(-0.4,4.382) 30(-1.2,4.382) 31(-2,4.382) 32(-2.8,4.382)
  silkscreen extent -4.36,-2.94 2.95,3.91, body extent -4.5,-4.5 4.5,4.5, height 0.53
TSSOP16 [mil]
  rect 58x14 smd: 1(-115,90) 2(-115,64) 3(-115,38) 4(-115,13) 5(-115,-13) 6(-115,-38) 7(-115,-64) 8(-115,-90) 9(115,-90) 10(115,-64) 11(115,-38) 12(115,-13) 13(115,13) 14(115,38) 15(115,64) 16(115,90)
  silkscreen extent -171,-100 74,100, body extent -126,-98 126,98, height 43
TYPE_C_16P [mm]
  oval 1x2.1 hole 0.6 slot 1.7 at 90 deg paste-2539.97 mask+0.051: 17(-4.32,1.816) 20(4.32,1.816)
  oval 1x1.8 hole 0.6 slot 1.4 at 90 deg paste-2539.97 mask+0.051: 18(-4.32,-2.384) 19(4.32,-2.384)
  rect 0.3x1.14 smd paste+0 mask+0.051: A5(-1.25,2.383) A6(-0.25,2.383) A7(0.25,2.383) A8(1.25,2.384) B5(1.75,2.383) B6(0.75,2.383) B7(-0.75,2.383) B8(-1.75,2.384)
  rect 0.5x1.14 smd paste+0 mask+0.051: A9B4(2.4,2.383) A12B1(3.2,2.383) B9A4(-2.4,2.383) B12A1(-3.2,2.383)
  round 0.65 hole 0.65 unplated paste-2539.97: ""(-2.89,1.296) ""(2.89,1.296)
  silkscreen extent -4.57,-5.08 4.57,0.63, body extent -4.45,-4.7 4.45,2.86, height 3.25
WQFN-28-EP(5x5) [mm]
  oval 0.9x0.28 smd paste+0 mask+0.051: 1(-2.5,1.501) 2(-2.5,1.001) 3(-2.5,0.501) 4(-2.5,0) 5(-2.5,-0.5) 6(-2.5,-1.001) 7(-2.5,-1.501) 15(2.5,-1.501) 16(2.5,-1.001) 17(2.5,-0.5) 18(2.5,0) 19(2.5,0.501) 20(2.5,1.001) 21(2.5,1.501)
  oval 0.28x0.9 smd paste+0 mask+0.051: 8(-1.501,-2.5) 9(-1.001,-2.5) 10(-0.501,-2.5) 11(0,-2.5) 12(0.5,-2.5) 13(1.001,-2.5) 14(1.501,-2.5) 22(1.501,2.5) 23(1.001,2.5) 24(0.5,2.5) 25(0,2.5) 26(-0.501,2.5) 27(-1.001,2.5) 28(-1.501,2.5)
  rect 3.2x3.2 smd paste+0 mask+0.051: 29(0,0)
  silkscreen extent -3.58,-2.65 2.65,2.65, body extent -2.58,-2.58 2.58,2.58, height 0.92

## Part data
C1 C5 C7 C8 C9 C22 C23 C29: library part C0603_MLCC_100nF_X7R_50V, "50V 100nF X7R ±10% 0603 Multilayer Ceramic Capacitors MLCC - SMD/SMT ROHS", LCSC Part=C14663, Manufacturer=YAGEO, Mfr. Part=CC0603KRX7R9BB104, Package=0603, Temperature Coefficient="X7R, 50V", Tolerance=±10%, Voltage Rating=50V, Capacitance=100nF, Link=https://www.lcsc.com/product-detail/C14663.html
C2 C17 C19: library part C0603_MLCC_22uF_X5R_6.3V, "6.3V 22uF X5R ±20% 0603 Multilayer Ceramic Capacitors MLCC - SMD/SMT ROHS", LCSC Part=C109448, Manufacturer=YAGEO, Mfr. Part=CC0603MRX5R5BB226, Package=0603, Temperature Coefficient="X5R, 6.3V", Tolerance=±20%, Voltage Rating=6.3V, Capacitance=22uF, Link=https://www.lcsc.com/product-detail/C109448.html
C3 C4 C15: library part C_ALU_47uF_25V_C, "25V ±20% 47uF SMD,D5xL6.1mm Hybrid Aluminum Electrolytic Capacitors ROHS", Capacitance=47uF, LCSC Part=C542300, Manufacturer=PANASONIC, Mfr. Part=EEHZK1E470R, Package=C, Tolerance=±20%, Voltage Rating=25V, Link=https://www.lcsc.com/product-detail/C542300.html
C6: library part C0603_MLCC_330nF_X7R_25V, "25V 330nF X7R ±10% 0603 Multilayer Ceramic Capacitors MLCC - SMD/SMT ROHS", LCSC Part=C107070, Manufacturer=YAGEO, Mfr. Part=CC0603KRX7R8BB334, Package=0603, Temperature Coefficient="X7R, 25V", Tolerance=±10%, Voltage Rating=25V, Capacitance=330nF, Link=https://www.lcsc.com/product-detail/C107070.html
C10 C12 C13 C16 C18 C27 C33: library part C0603_MLCC_10uF_X5R_25V, "25V 10uF X5R ±20% 0603 Multilayer Ceramic Capacitors MLCC - SMD/SMT ROHS", LCSC Part=C596327, Manufacturer=YAGEO, Mfr. Part=CC0603MRX5R8BB106, Package=0603, Temperature Coefficient="X5R, 25V", Tolerance=±20%, Voltage Rating=25V, Capacitance=10uF, Link=https://www.lcsc.com/product-detail/C596327.html
C11 C14: library part C0603_MLCC_22uF_X5R_10V, "10V 22uF X5R ±20% 0603 Multilayer Ceramic Capacitors MLCC - SMD/SMT ROHS", LCSC Part=C86295, Manufacturer="Samsung Electro-Mechanics", Mfr. Part=CL10A226MP8NUNE, Package=0603, Temperature Coefficient="X5R, 10V", Tolerance=±20%, Voltage Rating=10V, Capacitance=22uF, Link=https://www.lcsc.com/product-detail/C86295.html
C20: library part C0603_MLCC_47nF_X7R_50V, "50V 47nF X7R ±10% 0603 Multilayer Ceramic Capacitors MLCC - SMD/SMT ROHS", LCSC Part=C107093, Manufacturer=YAGEO, Mfr. Part=CC0603KRX7R9BB473, Package=0603, Temperature Coefficient="X7R, 50V", Tolerance=±10%, Voltage Rating=50V, Capacitance=47nF, Link=https://www.lcsc.com/product-detail/C107093.html
C21: library part C0603_MLCC_33nF_X7R_50V, "50V 33nF X7R ±10% 0603 Multilayer Ceramic Capacitors MLCC - SMD/SMT ROHS", LCSC Part=C106856, Manufacturer=YAGEO, Mfr. Part=CC0603KRX7R9BB333, Package=0603, Temperature Coefficient="X7R, 50V", Tolerance=±10%, Voltage Rating=50V, Capacitance=33nF, Link=https://www.lcsc.com/product-detail/C106856.html
C24: library part C0603_MLCC_1uF_X7R_50V, "50V 1uF X7R ±10% 0603 Multilayer Ceramic Capacitors MLCC - SMD/SMT ROHS", LCSC Part=C559769, Manufacturer=YAGEO, Mfr. Part=CC0603KRX7R9BB105, Package=0603, Temperature Coefficient="X7R, 50V", Tolerance=±10%, Voltage Rating=50V, Capacitance=1uF, Link=https://www.lcsc.com/product-detail/C559769.html
C25 C26 C31 C32: library part C0603_MLCC_33pF_NP0_50V, "50V 33pF NP0 ±5% 0603 Multilayer Ceramic Capacitors MLCC - SMD/SMT ROHS", LCSC Part=C107047, Manufacturer=YAGEO, Mfr. Part=CC0603JRNPO9BN330, Package=0603, Temperature Coefficient="NP0, 50V", Tolerance=±5%, Voltage Rating=50V, Capacitance=33pF, Link=https://www.lcsc.com/product-detail/C107047.html
C28: library part C0603_MLCC_10nF_X7R_50V, "50V 10nF X7R ±10% 0603 Multilayer Ceramic Capacitors MLCC - SMD/SMT ROHS", LCSC Part=C100042, Manufacturer=YAGEO, Mfr. Part=CC0603KRX7R9BB103, Package=0603, Temperature Coefficient="X7R, 50V", Tolerance=±10%, Voltage Rating=50V, Capacitance=10nF, Link=https://www.lcsc.com/product-detail/C100042.html
C30: library part C0603_MLCC_10pF_NP0_50V, "50V 10pF NP0 ±5% 0603 Multilayer Ceramic Capacitors MLCC - SMD/SMT ROHS", LCSC Part=C106245, Manufacturer=YAGEO, Mfr. Part=CC0603JRNPO9BN100, Package=0603, Temperature Coefficient="NP0, 50V", Tolerance=±5%, Voltage Rating=50V, Capacitance=10pF, Link=https://www.lcsc.com/product-detail/C106245.html
D1 D2 D3: "3A Independent Type 1.1V@3A 1kV SMAF Diodes - General Purpose ROHS", Manufacturer="Shandong Jingdao Microelectronics", Package=SMAF, Link=https://www.lcsc.com/product-detail/Diodes-General-Purpose_Shandong-Jingdao-Microelectronics-S3MF_C123928.html?s_z=n_s3m, Manufacture Part Number=S3MF, Packaging="Cut Tape"
D4: "40V Independent 550mV@5A 5A SMC Schottky Diodes ROHS", Manufacturer=TWGMC, Package=SMC, Voltage - Forward(Vf@If)=550mV@5A, Category="Schottky Diodes", Link=https://www.lcsc.com/product-detail/C5204950.html?s_z=n_B540C-13-F, Manufacture Part Number=SS54
D5: "1A 1V@1A 1kV SMA Diodes - General Purpose ROHS", LCSC Part=C20754788, Manufacturer=JSMSEMI, Mfr. Part="1N4007 M7", Package=SMA, Link=https://www.lcsc.com/product-detail/C20754788.html?s_z=n_1N4007
H1 H2: "2.54mm 1 6P Through Hole 1x6P Through Hole,P=2.54mm Female Headers ROHS", LCSC Part=C40877, Manufacturer="BOOMELE(Boom Precision Elec)", Mfr. Part=2.54-1*6P, Package="Through Hole,P=2.54mm", Holes Structure=1x6P, Link=https://www.lcsc.com/product-detail/C40877.html, Pitch=2.54mm
H3 H5: "2.54mm 1 3A 4P Bronze -40℃~+105℃ Through Hole 1x4P Top Square Hole Through Hole,P=2.54mm Female Headers ROHS", LCSC Part=C2718488, Manufacturer="BOOMELE(Boom Precision Elec)", Mfr. Part=2.54-1*4P, Package="Through Hole,P=2.54mm", Holes Structure=1x4P, Link=https://www.lcsc.com/product-detail/C2718488.html, Pitch=2.54mm
H4: "2.54mm 1 8P Through Hole 1x8P Through Hole,P=2.54mm Female Headers ROHS", LCSC Part=C27438, Manufacturer="BOOMELE(Boom Precision Elec)", Mfr. Part=2.54-1*8P, Package="Through Hole,P=2.54mm", Holes Structure=1x8P, Link=https://www.lcsc.com/product-detail/C27438.html, Pitch=2.54mm
H6: "1x2P -30℃~+120℃ 17A 250V Blue 14~22 Through Hole 5mm 1.5 1 2 Through Hole,P=5mm Screw Terminal Blocks ROHS", Color=Blue, LCSC Part=C474881, Manufacturer="Cixi Kefa Elec", Package="Through Hole,P=5mm", Category="Connectors/Screw Terminal Blocks", CONFIGURE=220VAC, Link=https://www.lcsc.com/product-detail/C474881.html, Mfr. Part=KF301-5.0-2P
IC1: library part LM7805_TO-263-3L, "62dB@(120Hz) 1A Fixed 4.8V~5.2V Positive 35V TO-263-3L Voltage Regulators - Linear, Low Drop Out (LDO) Regulators ROHS", LCSC Part=C5145372, Manufacturer="HANSCHIP semiconductor", Mfr. Part=LM7805SRG, Operating Temperature=-40℃~+85℃@(Ta), Output Current=1A, Output Voltage=4.8V~5.2V, Package=TO-263-3L, Voltage - Supply=35V, Category="Power Management (PMIC)/Voltage Regulators - Linear, Low Drop Out (LDO) Regulators", Link=https://www.lcsc.com/product-detail/C5145372.html?s_z=n_lm7805, Number of Outputs=1, Output Configuration=Positive
IC2: library part TP4056_ESOP-8, "4V~6V Lithium-ion/Polymer 1 ESOP-8 Battery Management ROHS", Charging Saturation Voltage=4.2V, LCSC Part=C382139, Manufacturer=TPOWER, Operating Temperature=-40℃~+85℃, Package=ESOP-8, Voltage - Supply=4V~6V, Key Attributes="1A Lithium Battery Charger", Link=https://www.lcsc.com/product-detail/C382139.html?s_z=n_tp4056, Mfr. Part=TP4056, Number of Cells=1, Type of Battery=Lithium-ion/Polymer
IC3: "1.5V~8V Lithium-ion/Polymer 1 SOT-23-6 Battery Management ROHS", Charging Saturation Voltage=4.3V, LCSC Part=C2927799, Manufacturer=YONGYUTAI, Operating Temperature=-40℃~+85℃, Package=SOT-23-6, Voltage - Supply=1.5V~8V, Key Attributes="Lithium battery protection circuit", Link=https://www.lcsc.com/product-detail/C2927799.html?s_z=n_dw01a, Mfr. Part=DW01A, Number of Cells=1, Type of Battery=Lithium-ion/Polymer
IC4: library part AMS1117-3.3_SOT-89-3L, "1A Fixed 3.3V Positive 15V SOT-89-3L Voltage Regulators - Linear, Low Drop Out (LDO) Regulators ROHS", LCSC Part=C5345982, Manufacturer="HXY MOSFET", Operating Temperature=0℃~+125℃@(Ta), Output Current=1A, Output Voltage=3.3V, Package=SOT-89-3L, Voltage - Supply=16V, Voltage Dropout=12mV@(1A), Category="Power Management (PMIC)/Voltage Regulators - Linear, Low Drop Out (LDO) Regulators", Link=https://www.lcsc.com/product-detail/C5345982.html?s_z=n_ams1117, Mfr. Part=AMS1117-3.3, Number of Outputs=1, Output Configuration=Positive
IC5: "12Mbps Transceiver WQFN-28-EP(5x5) USB Converters ROHS", LCSC Part=C6568, Manufacturer="SILICON LABS", Mfr. Part=CP2102-GMR, Package=WQFN-28-EP(5x5), Voltage - Supply=3V~3.6V, Applications Function=Transceiver, Data Rate=12Mbps, Key Attributes="Single-Chip USB to UART Bridge", Link=https://www.lcsc.com/product-detail/C6568.html?s_z=n_CP2102-GMR
IC7: library part DS1307-SOIC8, "I2C SOIC-8 Real Time Clocks ROHS", LCSC Part=C9868, Manufacturer=MAXIM, Mfr. Part=DS1307Z+T&R, Package=SOIC-8, Interface=I2C, Key Attributes="64 x 8, Serial, I²C Real-Time Clock", Link=https://www.lcsc.com/product-detail/C9868.html?s_z=n_DS1307
ICSP: "2.54mm 2.54mm 3A 2 6P -40℃~+105℃ Through Hole 2x3P Top Square Hole Through Hole,P=2.54mm Female Headers ROHS", LCSC Part=C18723054, Manufacturer=HanElectricity, Mfr. Part=2541FV-2x3P, Package="Through Hole,P=2.54mm", Holes Structure=2x3P, Link=https://www.lcsc.com/product-detail/C18723054.html?s_z=n_HanElectricity%25202541FV-2x3P
J1 J2 J3 J4 J5: "250V 3A Through Hole Pin Header 2.5mm 3P 6mm -40℃~+105℃ 3mm 2.54mm 1 Black 1x3P Through Hole,P=2.54mm Pin Headers ROHS", LCSC Part=C2937625, Manufacturer=XFCN, Mfr. Part=PZ254V-11-03P, Package="Through Hole,P=2.54mm", Insulation Height="Insulation Height", Link=https://www.lcsc.com/product-detail/C2937625.html, Number of Rows=1, Pin Structure=1x3P
JP1: library part TYPE_C_16P, "3A USB 3.1 1 Surface Mount, Right Angle 16P Female -40℃~+85℃ Type-C SMD USB Connectors ROHS", Current Rating-Power=3A, LCSC Part=C7507405, Manufacturer="SHOU HAN", Mfr. Part=TYPE-C-3.1-16PIN, Operating Temperature=-40℃~+85℃, Package=SMD, Gender=Female, Link=https://www.lcsc.com/product-detail/C7507405.html?s_z=n_SHOU%2520HAN%2520TYPE-C-3.1-16PIN, Mounting Type="Surface Mount, Right Angle", Number of Contacts=16P, Protocol Standard="USB 3.1"
JP2: library part DC_POWER_JACK_6.3mm_2.1mm, "Right Angle DC Power Jack -40℃~+85℃ 2.1mm 6.3mm 3A 500V Through Hole DC Power Connectors ROHS", Current Rating=3A, LCSC Part=C7498153, Manufacturer="Lian Xin Technology", Mfr. Part=XDJK-0051-025, Operating Temperature=-40℃~+85℃, Package="Through Hole", Voltage Rating (Max)=500V, Connector Type="DC Power Jack", Current Rating-Power=3A, Inside Contact Diameter=2.1mm, Link=https://www.lcsc.com/product-detail/C7498153.html?s_z=n_XDJK-0051-025, Outside Contact Diameter=6.3mm, Reference=6.3mm_2.1mm
L1: library part CD54_4.7uH_3.1A, "3.1A 4.7uH ±20% SMD,5.8x5.2mm Power Inductors ROHS", Current=3.1A, Inductor=4.7uH, Manufacture Part Number=CD54-4R7M, Manufacturer=Ceaiya, Package=CD54, Link=https://www.lcsc.com/product-detail/Power-Inductors_Ceaiya-CD54-4R7M_C7588991.html?s_z=n_cd54%204.7uH, Packaging="Cut Tape"
LED1: library part LED0603_Red, "20mA 230mcd Water Clear -40℃~+85℃ 630nm Red 120° 75mW 1.95V 0603 LED Indication - Discrete ROHS", Forward Current=20mA, LCSC Part=C5875723, Manufacturer=Kingbright, Mfr. Part=APT1608SURCK, Operating Temperature=-40℃~+85℃, Package=0603, Power(Watts)=75mW, Voltage - Forward(Vf)=1.95V, Illumination Color=Red, Key Attributes="1.6 x 0.8 mm SMD Chip LED Lamp", Link=https://www.lcsc.com/product-detail/C5875723.html
LED2: library part LED0603_Blue, "2mA 24mcd Water Clear -40℃~+85℃ 470nm Blue 130° 120mW 2.65V 0603 LED Indication - Discrete ROHS", Forward Current=2mA, LCSC Part=C5200747, Manufacturer=Kingbright, Mfr. Part=APT1608LVBC/D, Operating Temperature=-40℃~+85℃, Package=0603, Power(Watts)=120mW, Voltage - Forward(Vf)=2.65V, Illumination Color=Blue, Key Attributes="1.6 x 0.8 mm SMD Chip LED Lamp", Link=https://www.lcsc.com/product-detail/C5200747.html
LED3: library part LED7SEG_Common_Anode, "Red 4 Common Anode 0.56 Through Hole LED Segment Displays ROHS", Illumination Color=Red, LCSC Part=C10713, Manufacturer=ZHIHAO, Mfr. Part=FJ5461BH, Package="Through Hole", LED Polarity="Common Anode", Link=https://www.lcsc.com/product-detail/C10713.html
LED4: library part LED0603_Green, "2mA 20mcd~50mcd Water Clear 525nm -40℃~+85℃ Green 130° 75mW 2.65V 0603 LED Indication - Discrete ROHS", Forward Current=2mA, LCSC Part=C598356, Manufacturer=Kingbright, Mfr. Part=KPT-1608LVZGCK, Operating Temperature=-40℃~+85℃, Package=0603, Power(Watts)=75mW, Voltage - Forward(Vf)=2.65V, Illumination Color=Green, Key Attributes="1.6X0.8mm SMD CHIP LED LAMP", Link=https://www.lcsc.com/product-detail/C598356.html
Q1 Q2: "30V 4.2A 42mΩ@10V,4A 1.4W 800mV@250uA 1 Piece P-Channel SOT-23 MOSFETs ROHS", Continuous Drain Current (Id)=4.2A, Drain Source Voltage (Vdss)=30V, Manufacturer=ElecSuper, Package=SOT-23-3, Power Dissipation (Pd)=1.4W, Link=https://www.lcsc.com/product-detail/MOSFETs_ElecSuper-AO3401_C5224195.html, Manufacture Part Number=AO3401, Packaging="Cut Tape (CT)"
Q3: "20V 25mΩ@2.5V,3A 1.5W 500mV SOT-23-6 MOSFETs ROHS", Drain to Source Voltage=20V, Gate Threshold Voltage (Vgs(th)@Id)=500mV, Manufacturer="TECH PUBLIC", Package=SOT-23-6, Link=https://www.lcsc.com/product-detail/MOSFETs_TECH-PUBLIC-FS8205A_C2830320.html?s_z=n_fs8205, Manufacture Part Number=FS8205A, Packaging="Cut Tape (CT)", RDS(on)=25mΩ@2.5V,3A
Q4 Q5 Q6 Q7: "50V 200@2A,2V 1.2W 5A NPN SOT-23 Bipolar (BJT) ROHS", Current - Collector(Ic)=5A, LCSC Part=C92166, Manufacturer=DIODES, Operating Temperature=-55℃~+150℃, Package=SOT-23, Pd - Power Dissipation=1.2W, Transition frequency(fT)=125MHz, Category=BJT, Link=https://www.lcsc.com/product-detail/C92166.html, Mfr. Part=ZXTN2031FTA, Type=NPN, Vce Saturation(VCE(sat))="Vce Saturation(VCE(sat))"
Q9: library part 2N2222_SOT-89, "40V 500mW 600mA NPN SOT-89 Bipolar (BJT) ROHS", Current - Collector(Ic)=600mA, LCSC Part=C21714170, Manufacturer=CBI, Mfr. Part=2N2222AU, Package=SOT-89, Pd - Power Dissipation=500mW, Transition frequency(fT)=300MHz, Category=BJT, Link=https://www.lcsc.com/product-detail/C21714170.html?s_z=n_2N2222, Type=NPN, Vce Saturation(VCE(sat))=1V@500mA.50mA
R1 R2: library part R0603_5.1kΩ_±1%, "100mW Thick Film Resistor 75V ±100ppm/℃ ±1% 5.1kΩ 0603 Chip Resistor - Surface Mount ROHS", LCSC Part=C105580, Manufacturer=YAGEO, Mfr. Part=RC0603FR-075K1L, Operating Temperature=-55℃~+155℃, Package=0603, Power(Watts)=100mW, Tolerance=±1%, Link=https://www.lcsc.com/product-detail/C105580.html, Resistance=5.1kΩ
R3 R4 R8 R10 R11 R12 R13 R15: library part R0603_10kΩ_±1%, "100mW Thick Film Resistor 75V ±100ppm/℃ ±1% 10kΩ 0603 Chip Resistor - Surface Mount ROHS", LCSC Part=C98220, Manufacturer=YAGEO, Mfr. Part=RC0603FR-0710KL, Operating Temperature=-55℃~+155℃, Package=0603, Tolerance=±1%, Link=https://www.lcsc.com/product-detail/C98220.html, Resistance=10kΩ
R5: library part R0603_100Ω_±1%, "100mW Thick Film Resistor 75V ±100ppm/℃ ±1% 100Ω 0603 Chip Resistor - Surface Mount ROHS", LCSC Part=C845629, Manufacturer=YAGEO, Mfr. Part=RC0603FR-13100RL, Operating Temperature=-55℃~+155℃, Package=0603, Tolerance=±1%, Link=https://www.lcsc.com/product-detail/C845629.html, Resistance=100Ω
R6 R22: library part R0603_2kΩ_±1%, "100mW Thick Film Resistor 75V ±100ppm/℃ ±1% 2kΩ 0603 Chip Resistor - Surface Mount ROHS", LCSC Part=C105576, Manufacturer=YAGEO, Mfr. Part=RC0603FR-072KL, Operating Temperature=-55℃~+155℃, Package=0603, Tolerance=±1%, Link=https://www.lcsc.com/product-detail/C105576.html, Resistance=2kΩ
R7 R14: library part R0603_1kΩ_±1%, "100mW Thick Film Resistor 75V ±100ppm/℃ ±1% 1kΩ 0603 Chip Resistor - Surface Mount ROHS", LCSC Part=C22548, Manufacturer=YAGEO, Mfr. Part=RC0603FR-071KL, Operating Temperature=-55℃~+155℃, Package=0603, Tolerance=±1%, Link=https://www.lcsc.com/product-detail/C22548.html, Resistance=1kΩ
R9: library part R0603_49.9KΩ_±1%, "100mW Thick Film Resistor 75V ±100ppm/℃ ±1% 49.9kΩ 0603 Chip Resistor - Surface Mount ROHS", LCSC Part=C114624, Manufacturer=YAGEO, Mfr. Part=RC0603FR-0749K9L, Operating Temperature=-55℃~+155℃, Package=0603, Tolerance=±1%, Link=https://www.lcsc.com/product-detail/C114624.html?s_z=n_C114624, Resistance=49.9kΩ
R16 R21: library part R0603_330Ω_±1%, "100mW Thick Film Resistor 75V ±100ppm/℃ ±1% 330Ω 0603 Chip Resistor - Surface Mount ROHS", LCSC Part=C105881, Manufacturer=YAGEO, Mfr. Part=RC0603FR-07330RL, Operating Temperature=-55℃~+155℃, Package=0603, Tolerance=±1%, Link=https://www.lcsc.com/product-detail/C105881.html, Resistance=330Ω
R17 R18 R19 R23 R24: library part R0603_4.7kΩ_±1%, "100mW Thick Film Resistor 75V ±100ppm/℃ ±1% 4.7kΩ 0603 Chip Resistor - Surface Mount ROHS", LCSC Part=C99782, Manufacturer=YAGEO, Mfr. Part=RC0603FR-074K7L, Operating Temperature=-55℃~+155℃, Package=0603, Tolerance=±1%, Link=https://www.lcsc.com/product-detail/C99782.html, Resistance=4.7kΩ
R20: "8 ±2% 330Ω 160mW ±100ppm/℃ SOIC-16-5.6mm Resistor Networks, Arrays ROHS", Manufacturer=BOURNS, Number of Resistors=8, Package=SOIC-16-5.6mm, Resistance=330Ω, Tolerance=±2%, Link=https://www.lcsc.com/product-detail/C1731150.html, Number of Pins=16
R25: library part R0603_2.55KΩ_±0.1%, "100mW Thin Film Resistor 75V ±25ppm/℃ ±0.1% 2.55kΩ 0603 Chip Resistor - Surface Mount ROHS", LCSC Part=C326728, Manufacturer=YAGEO, Mfr. Part=RT0603BRD072K55L, Operating Temperature=-55℃~+155℃, Package=0603, Tolerance=±0.1%, Link=https://www.lcsc.com/product-detail/C326728.html, Resistance=2.55kΩ
R26: library part R0603_16.2KΩ_±0.1%, "100mW Thin Film Resistor 75V ±50ppm/℃ ±0.1% 16.2kΩ 0603 Chip Resistor - Surface Mount ROHS", LCSC Part=C728602, Manufacturer=YAGEO, Mfr. Part=RT0603BRE0716K2L, Operating Temperature=-55℃~+155℃, Package=0603, Tolerance=±0.1%, Link=https://www.lcsc.com/product-detail/C728602.html, Resistance=16.2kΩ
R27: library part R0603_133KΩ_±0.1%, "100mW Thin Film Resistor 75V ±50ppm/℃ ±0.1% 133kΩ 0603 Chip Resistor - Surface Mount ROHS", LCSC Part=C861659, Manufacturer=YAGEO, Mfr. Part=RT0603BRE07133KL, Operating Temperature=-55℃~+155℃, Package=0603, Tolerance=±0.1%, Link=https://www.lcsc.com/product-detail/C861659.html, Resistance=133KΩ
RESET: library part SW_BUTTON_SMD_3mm×4mm, "Without Bracket 50mA 4mm 100,000 Cycles 12V 1.6N 3mm 2mm Round Button Surface Mount,Vertical SPST SMD Tactile Switches ROHS", LCSC Part=C720477, Manufacturer=XUNPU, Mfr. Part=TS-1088-AR02016, Operating Temperature=-30℃~+80℃, Package=SMD, Voltage Rating=12V, Length=4mm, Link=https://www.lcsc.com/product-detail/C720477.html?s_z=n_Button, Width=3mm
RL1: "250V@AC 5V 15A 1 Form C: 1C (SPDT-CO) Through Hole,15.6x19.2mm Power Relays ROHS", Coil Voltage=5V, LCSC Part=C35449, Manufacturer="Songle Relay", Package="Through Hole,15.6x19.2mm", Switching Current(Max)=15A, Switching Voltage(Max)=250V@AC, Link=https://www.lcsc.com/product-detail/C35449.html?s_z=n_relay, Mfr. Part=SRD-05VDC-SL-C, Number of Pins=5
SW1: "500mA SPDT 50V 5千次 Plugin Slide Switches ROHS", Manufacturer="SHOU HAN", Package=Plugin, Link=https://www.lcsc.com/product-detail/Slide-Switches_SHOU-HAN-SK12D07VG4_C393937.html, Manufacture Part Number=SK12D07VG4
T1 T2: "90V 150uA 5Ω@10V 330mW 3V@1mA 1 N-Channel SOT-23 MOSFETs ROHS", Gate Threshold Voltage (Vgs(th))=3V@1mA, LCSC Part=C151050, Manufacturer=DIODES, Package=SOT-23, Category=Transistors/Thyristors/MOSFETs, Link=https://www.lcsc.com/product-detail/C151050.html?s_z=n_BS170, Number=BS170F
TP1 TP2 TP3 TP4 TP5 TP6 TP7 TP8 TP9 TP10 TP11: library part TEST_POINT
U1: library part PIN_18650_1S_HOLDER_SMD, "Battery Holder -10℃~+100℃ Gold Phosphor Bronze Button And Strip Battery Connector ROHS", LCSC Part=C5371777, Manufacturer=MYOUNG, Mfr. Part=BH-18650-B5BA008, Package=---, Battery Type=18650, Connector Type="Battery Holder", Link=https://www.lcsc.com/product-detail/C5371777.html?s_z=h_BATTERRY%252018650%2520HOLER
U2: "Battery Holder -25℃~+85℃ Phosphor Bronze CR1220 SMD Button And Strip Battery Connector ROHS", LCSC Part=C964723, Manufacturer=MYOUNG, Mfr. Part=BS-12-B3AA003, Package=SMD, Battery Type=CR1220, Link=https://www.lcsc.com/product-detail/C964723.html
U3: "AVR 20MHz TQFP-32(7x7) Microcontrollers (MCU/MPU/SOC) ROHS", LCSC Part=C14877, Manufacturer=MICROCHIP, Package=TQFP-32(7x7), Voltage - Supply=1.8V~5.5V, ADC (Bit)=10bit, CPU Core=AVR, CPU Maximum Speed=20MHz, EEPROM=1KB, Key Attributes="8-bit Microcontroller with In-System Programmable Flash", Link=https://www.lcsc.com/product-detail/C14877.html, Mfr. Part=ATMEGA328P-AU, Number of I/O=23, Program Memory Type=FLASH, Program Storage Size=32KB
U4: "8 2V~6V 1 Serial-to-Serial or Parallel TSSOP-16 Shift Registers ROHS", LCSC Part=C5948, Manufacturer=Nexperia, Mfr. Part=74HC595PW,118, Package="TSSOP16-16 Nexperia USA Inc.", Voltage - Supply=2V~6V, Link=https://www.lcsc.com/product-detail/C5948.html?s_z=n_74hc595
U5: "SO-4 Transistor, Photovoltaic Output Optoisolators ROHS", LCSC Part=C5255297, Manufacturer=TOSHIBA, Mfr. Part=TLP291(GB-TP,SE(T, Package=SO-4
U6: "Boost Adjustable 2.9V~38V 2.9V~18V 3A HTSSOP-14-EP DC-DC Converters ROHS", Frequency - Switching=2.2MHz, LCSC Part=C43276, Manufacturer=TI, Output Current=3A, Package=HTSSOP-14-EP, Voltage - Supply=2.9V~18V, Function=Boost, Link=https://www.lcsc.com/product-detail/C43276.html?s_z=n_TPS61175, Mfr. Part=TPS61175PWPR, Number of Outputs=1
X1: library part Crystal_16Mhz_HC49S, "16MHz Through Hole Crystal Oscillator 20pF ±20ppm ±30ppm HC-49S Crystals ROHS", Frequency Stability=±30ppm, LCSC Part=C16212, Load Capacitance=20pF, Manufacturer="YXC Crystal Oscillators", Mfr. Part=X49SD16MSD2SC, Operating Temperature=-20℃~+70℃, Package=HC-49S, Frequency=16MHz, Link=https://www.lcsc.com/product-detail/C16212.html, Type="Through Hole Crystal Oscillator"
X2: library part Crystal_32.768Khz, "32.768kHz 12.5pF ±20ppm SMD3215-2P Crystals ROHS", Frequency Stability=-, LCSC Part=C156245, Load Capacitance=12.5pF, Manufacturer=NDK, Mfr. Part=NX3215SA-32.768K-STD-MUA-8, Operating Temperature=-40℃~+85℃, Package=SMD3215-2P, Frequency=32.768kHz, Link=https://www.lcsc.com/product-detail/C156245.html?s_z=n_Crystal%252032%252C768kHz, Type=-

## Via types
v1: diameter 27.56, hole 15.75, Top Layer to Bottom Layer, tented both sides, 182 vias
v2: diameter 23.62, hole 11.81, Top Layer to Bottom Layer, tented both sides, 69 vias
v3: diameter 27.56, hole 15.75, Top Layer to Bottom Layer, tented top, 9 vias
v4: diameter 24, hole 12, Top Layer to Bottom Layer, tented both sides, 4 vias

## Nets (pads, with @x,y where several pads share a name; then routed paths per layer and width w, separated by ;. In a path a pad name is that pad's centre, name@x,y a point inside that pad or via, vN(x,y) a via of type N, cw(c..) or ccw(c..) an arc to the next point about the centre after c; other vN are vias at no path point)
+3V3: C18.2 C19.2 C22.2 H5.2 IC4.2 IC5.6 R10.2 R13.2 R14.2 T1.1 T2.1 TP5.1 TP7.1 | length 4839.2
  Top Layer w10: H5.2@411.93,1877.01 488.67,1877.01 510.15,1898.49 510.15,2158.49 525.15,2173.49 v2(664.15,2173.49) ; R10.2@664.15,2123.49 v2(664.15,2173.49) ; R14.2@755.15,2315.84 755.15,2179.35 749.29,2173.49 v2(664.15,2173.49) ; T2.1@870.52,2053.44 v2(918.15,2053.49) v2(918.15,2053.49) ; IC5.6@1101.15,2407.19 1163.45,2407.19 1178.15,2392.49 1178.15,2295.7 1184.01,2289.85 C22.2@1212.59,2289.85 1212.59,2258.94 ; v3(1132.15,2245.49) 1199.15,2245.49 1212.59,2258.94 ; R13.2@1159.15,2056.53 1204.19,2056.53 1212.59,2064.94 1212.59,2258.94
  Bottom Layer w10: v2(664.15,2173.49) 902.29,2173.49 918.15,2157.64 v2(918.15,2053.49) 1102.38,2053.49 1132.15,2083.26 v3(1132.15,2245.49) 1133.15,2244.49 1348.29,2244.49 1354.15,2250.35 1354.15,2678.49 1415.15,2739.49 1804.15,2739.49 1833.15,2768.49 1833.15,3193.49 1874.15,3234.49 2675.29,3234.49 2681.15,3240.35 2681.15,3412.81 2676.81,3417.15 v3(2681.15,3421.49)
+5V: C15.1 C16.2 C17.2 C23.2 C24.2 C27.2 C28.2 C33.1 D4.1 D5.1 H5.1 IC4.3 IC5.7 IC5.8 IC7.8 ICSP.6 LED2.1 Q4.3 Q5.3 Q6.3 Q7.3 R9.2 R11.2 R12.2 R15.2 R17.2 R18.2 R19.2 R21.2 R23.2 R24.2 RL1.5 TP6.1 TP8.1 U3.4 U3.6 U3.18 U4.10 U4.16 U5.4 | length 15960.7
  Top Layer w10: v2(682.15,1711.49) 684.75,1708.89 702.75,1708.89 703.15,1708.49 703.5,1708.85 R23.2@767.15,1708.85 R24.2@767.15,1638.85 ; C28.2@769.59,1488.85 C27.2@769.59,1568.85 R24.2@769.59,1636.4 ; IC5.7@1101.15,2426.89 1201.29,2426.89 1212.04,2437.64 ; v2(2052.15,1241.49) 2095.8,1241.49 R19.2@2096.15,1241.84 ; v2(2224.15,1212.49) 2223.61,1213.04 2223.61,1230.95 2228.21,1235.55 2228.21,1248.73 2236.32,1256.84 IC7.8@2257.15,1256.84 ; U4.10@2398.31,1729.06 2398.59,1728.78 2443.87,1728.78 v2(2444.15,1728.49) ; U4.16@2398.31,1883.06 2399.09,1882.28 2444.37,1882.28 v2(2445.15,1881.49) ; v2(2556.15,1593.49) 2558.15,1595.49 2566.15,1595.49 2566.58,1595.06 Q5.3@2594.31,1595.06 ; v2(2765.15,1596.49) 2765.95,1595.69 Q4.3@2798.31,1595.69 ; v2(2965.15,1595.49) 2972.15,1595.49 2972.34,1595.69 Q7.3@3002.31,1595.69 ; v2(3170.15,1596.49) 3170.32,1596.32 Q6.3@3203.71,1596.32
  Top Layer w15: R15.2@437.65,2801.85 436.15,2813.85 436.15,2901.64 442.01,2907.49 823.01,2907.49 828.87,2901.64 ICSP.6@828.87,2840.49 1179.15,2840.49 ; R12.2@693.84,1937.49 682.96,1926.62 682.96,1908.99 680.15,1906.18 v2(680.15,1902.49) 680.15,1854.35 686.01,1848.49 916.15,1848.49 934.15,1866.49 934.15,1905.75 ; R11.2@931.84,1946.49 934.15,1944.18 934.15,1905.75 ; IC5.8@1061.83,2466.22 1062.02,2466.42 1062.02,2485.32 1068.2,2491.49 1204.15,2491.49 C23.2@1207.18,2488.46 ; v2(1145.15,1321.49) 1146.4,1322.75 1146.4,1660.75 1157.15,1671.49 1235.03,1671.49 1240.89,1677.35 U3.18@1240.89,1723.49 1240.89,1909.52 ; 1152.26,1333.49 1203.53,1333.49 1209.39,1339.35 U3.6@1209.39,1379.49 ; 1212.04,2437.64 1212.04,2807.6 1179.15,2840.49 ; 934.15,1905.75 1237.12,1905.75 1240.89,1909.52 ; 1179.15,2840.49 1338.15,2840.49 1378.36,2800.28 LED2.1@1378.36,1967.53 1246.75,1967.53 1240.89,1961.68 1240.89,1909.52
  Top Layer w20: R9.2@1267.16,2938.53 1267.16,2904.21 1278.87,2892.49 1707.43,2892.49 1719.15,2904.21 1719.15,2969.58 1727.06,2977.49 C15.1@1756.63,2977.49 ; C15.1@1766.85,2977.49 1766.85,3006.79
  Top Layer w25: v2(2072.46,3583.8) R21.2@2072.46,4088.49 2068.15,4092.8 2068.15,4308.85 2082.79,4323.49 2141.5,4323.49 2156.15,4338.14 2156.15,4408.49 2167.15,4419.49 U5.4@2337.3,4419.49 2337.79,4419 2402.59,4419 2425.15,4396.44 D5.1@2425.15,4392.49 v2(2425.15,4293.49) ; C33.1@2449.66,1646.92 2449.66,1608.14 2464.3,1593.49 v2(2556.15,1593.49)